# Altium PCB PCB1.PcbDoc (part 1 of 2)
Units mm, origin at the board's own origin, x right, y up, seen from the top; angles counter-clockwise.
Board outline 152.4 x 101.6 mm, 2 copper layers (Top Layer, Bottom Layer); 142 components, 437 nets, 1185 pads, 0 vias.
Unrouted connection lines stored in the file: 722.
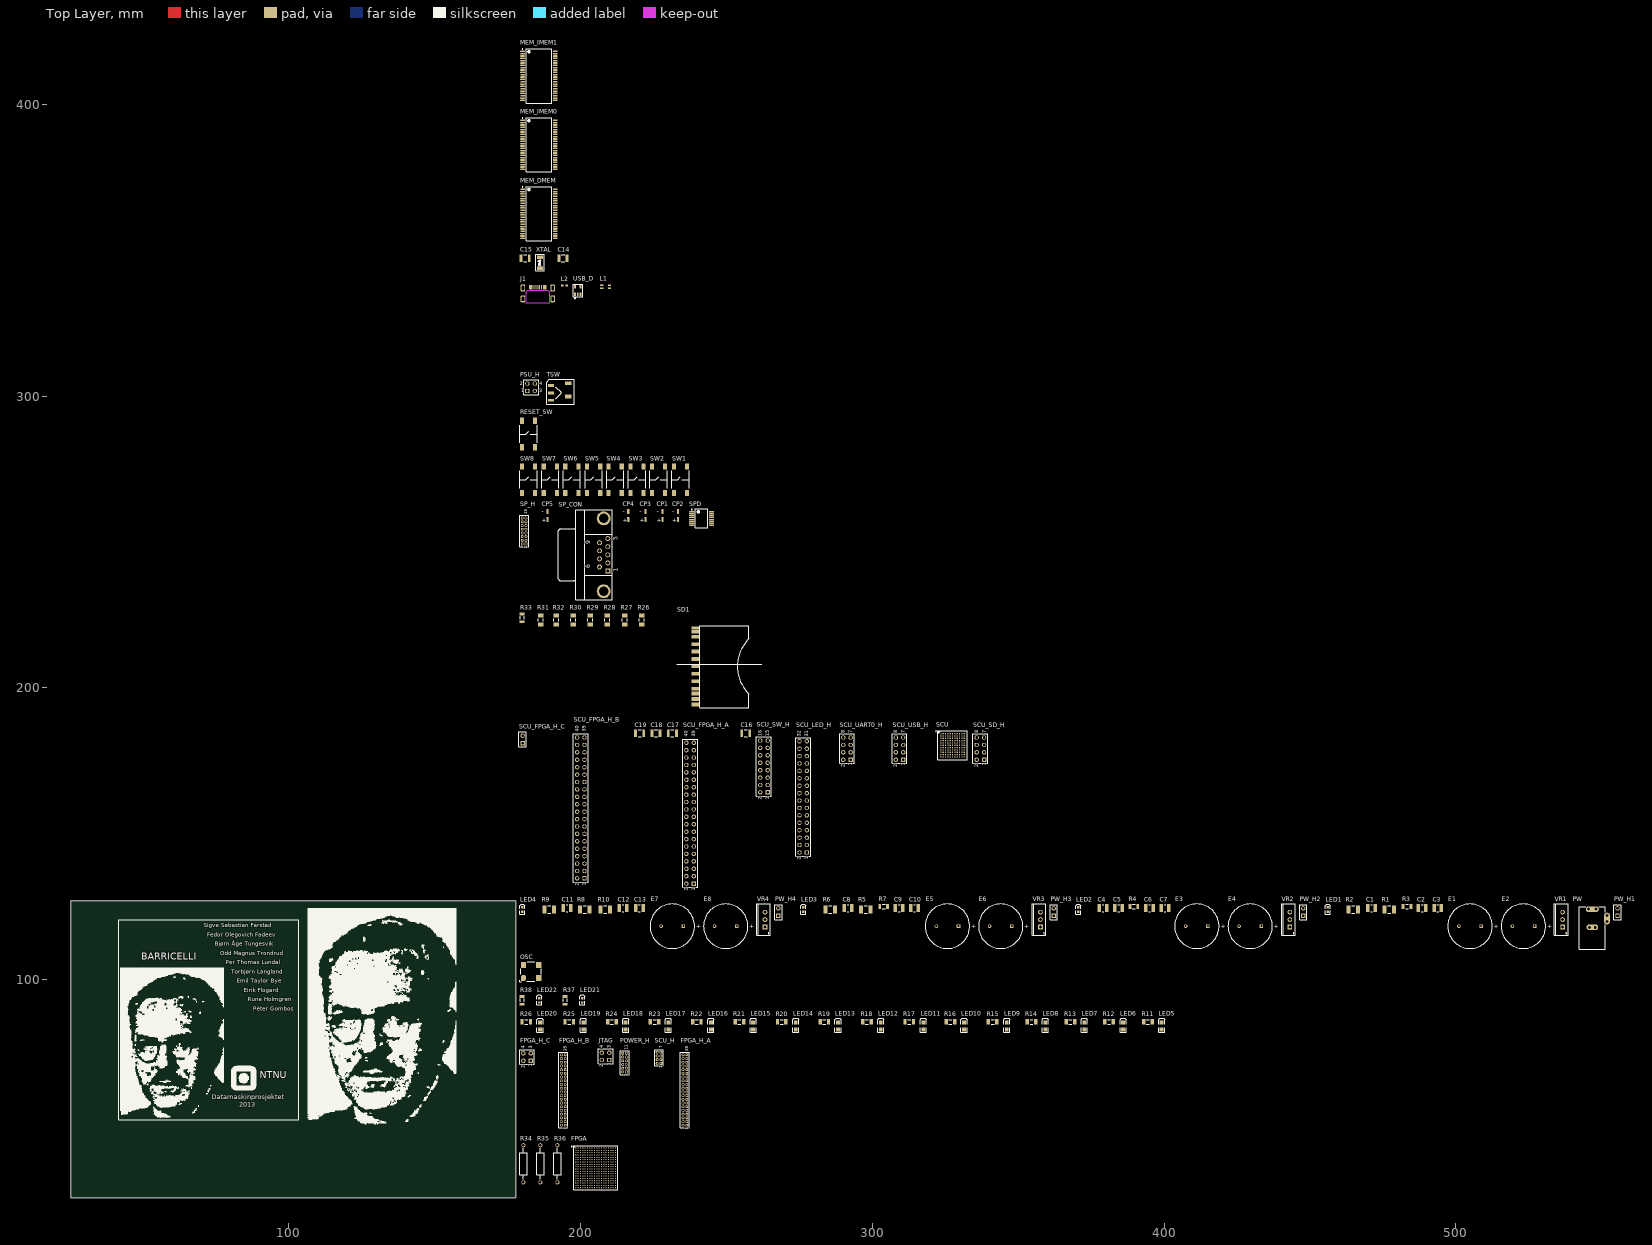
[diagram p0: Top Layer view]
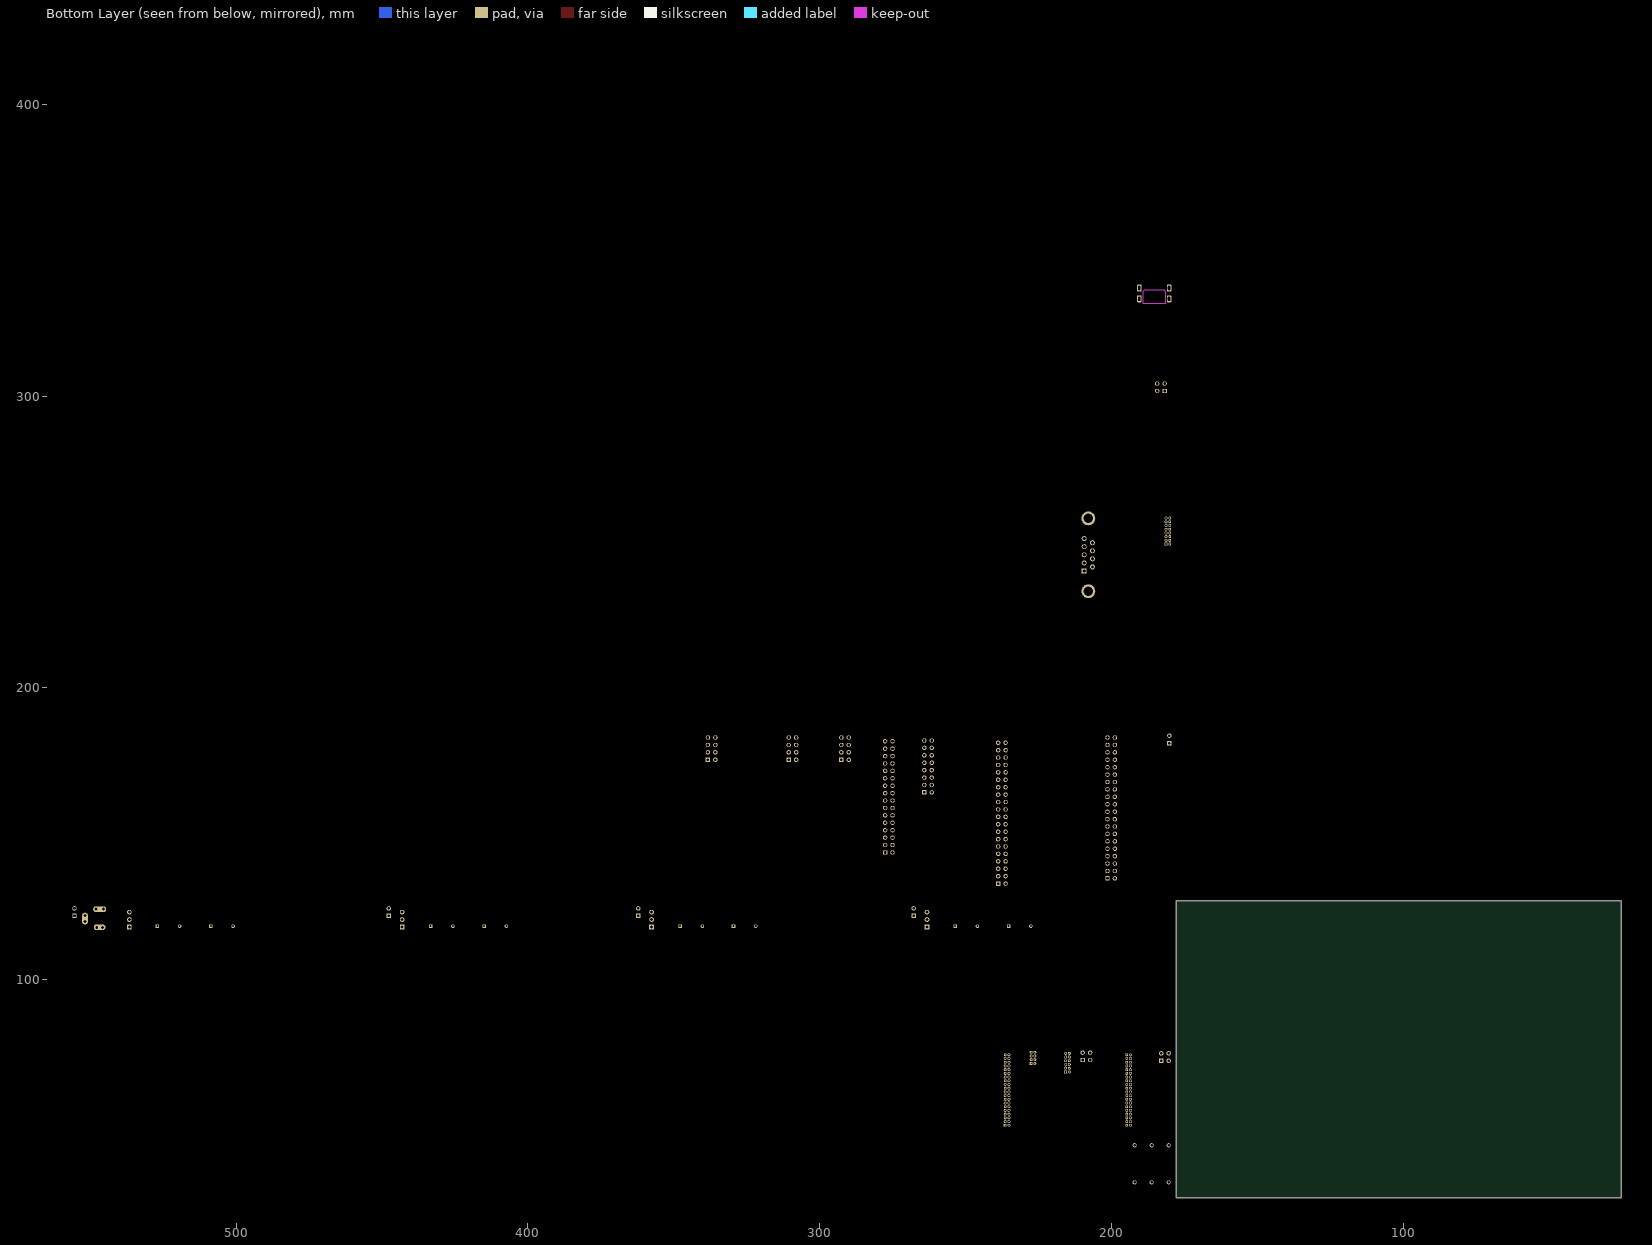
[diagram p1: Bottom Layer view, seen from below]

## Layer stack, top to bottom
Top Layer: signal copper 0.0356
Dielectric: dielectric 0.32, FR-4, Dk 4.8
Bottom Layer: signal copper 0.0356

## Board outline
25.4,25.4 177.8,25.4 177.8,127 25.4,127

## Design rules (kind name [scope] priority, off if disabled: settings)
Clearance [All] p1: gap=0.254
PolygonConnect [All] p1: connectstyle=Relief reliefconductorwidth=0.254 reliefentries=4 polygonreliefangle="90 Angle" airgapwidth=0.254
RoomDefinition XTAL [InComponentClass('XTAL')] p1: confinementstyle=ConfineIn formatcopy=TRUE lockcomponents=FALSE outline 178.943,342.646 196.596,342.646 196.596,351.409 178.943,351.409
RoomDefinition USB [InComponentClass('USB')] p2: confinementstyle=ConfineIn formatcopy=TRUE lockcomponents=FALSE outline 178.943,310.007 211.201,310.007 211.201,341.376 178.943,341.376
RoomDefinition U_psu_toggle_switch [InComponentClass('U_psu_toggle_switch')] p3: confinementstyle=ConfineIn formatcopy=TRUE lockcomponents=FALSE outline 178.943,296.926 198.247,296.926 198.247,308.61 178.943,308.61
RoomDefinition U_microcontroller_reset_button [InComponentClass('U_microcontroller_reset_button')] p4: confinementstyle=ConfineIn formatcopy=TRUE lockcomponents=FALSE outline 178.943,281.051 191.516,281.051 191.516,295.656 178.943,295.656
RoomDefinition SW [InComponentClass('SW')] p5: confinementstyle=ConfineIn formatcopy=TRUE lockcomponents=FALSE outline 178.943,265.43 237.49,265.43 237.49,279.781 178.943,279.781
RoomDefinition SERIAL_PORT [InComponentClass('SERIAL_PORT')] p6: confinementstyle=ConfineIn formatcopy=TRUE lockcomponents=FALSE outline 178.943,229.87 246.126,229.87 246.126,264.16 178.943,264.16
RoomDefinition SD [InComponentClass('SD')] p7: confinementstyle=ConfineIn formatcopy=TRUE lockcomponents=FALSE outline 178.943,84.201 254.889,84.201 254.889,228.727 178.943,228.727
RoomDefinition SCU [InComponentClass('SCU')] p8: confinementstyle=ConfineIn formatcopy=TRUE lockcomponents=FALSE outline 178.943,130.048 346.837,130.048 346.837,188.595 178.943,188.595
RoomDefinition PS [InComponentClass('PS')] p9: confinementstyle=ConfineIn formatcopy=TRUE lockcomponents=FALSE outline 178.943,110.236 561.34,110.236 561.34,128.778 178.943,128.778
RoomDefinition OSC [InComponentClass('OSC')] p10: confinementstyle=ConfineIn formatcopy=TRUE lockcomponents=FALSE outline 178.943,98.933 186.944,98.933 186.944,108.966 178.943,108.966
RoomDefinition LEDS_LOGO [InComponentClass('LEDS_LOGO')] p11: confinementstyle=ConfineIn formatcopy=TRUE lockcomponents=FALSE outline 178.943,90.805 207.01,90.805 207.01,97.663 178.943,97.663
RoomDefinition LEDS [InComponentClass('LEDS')] p12: confinementstyle=ConfineIn formatcopy=TRUE lockcomponents=FALSE outline 178.943,81.661 404.241,81.661 404.241,228.727 178.943,228.727
RoomDefinition IMEM1 [InComponentClass('IMEM1')] p13: confinementstyle=ConfineIn formatcopy=TRUE lockcomponents=FALSE outline 178.943,399.923 192.659,399.923 192.659,422.275 178.943,422.275
RoomDefinition IMEM0 [InComponentClass('IMEM0')] p14: confinementstyle=ConfineIn formatcopy=TRUE lockcomponents=FALSE outline 178.943,376.301 192.786,376.301 192.786,398.653 178.943,398.653
RoomDefinition HEADERS [InComponentClass('HEADERS')] p15: confinementstyle=ConfineIn formatcopy=TRUE lockcomponents=FALSE outline 178.943,48.133 246.634,48.133 246.634,80.391 178.943,80.391
RoomDefinition FPGA [InComponentClass('FPGA')] p16: confinementstyle=ConfineIn formatcopy=TRUE lockcomponents=FALSE outline 178.943,26.797 213.995,26.797 213.995,46.863 178.943,46.863
RoomDefinition DMEM [InComponentClass('DMEM')] p17: confinementstyle=ConfineIn formatcopy=TRUE lockcomponents=FALSE outline 178.943,352.679 192.659,352.679 192.659,375.031 178.943,375.031
RoutingVias [All] p1: holewidth=0.711 width=1.27 viastyle="Through Hole" minholewidth=0.711 minwidth=1.27 maxholewidth=0.711 maxwidth=1.27
SolderMaskExpansion [All] p1: expansion=0.102
Width [All] p1: maxlimit=0.254 minlimit=0.254 preferedwidth=0.254
28 further rules are at their usual default settings.

## Classes and differential pairs
channel class memorychip_schematic: DMEM IMEM0 IMEM1
net class SW[0..7]: SW0 SW1 SW2 SW3 SW4 SW5 SW6 SW7
net class LED[0..15]: LED0 LED1 LED2 LED3 LED4 LED5 LED6 LED7 LED8 LED9 LED10 LED11 LED12 LED13 LED14 LED15
net class INST_MEM1.BUS[0..15]: INST_MEM1.BUS0 INST_MEM1.BUS1 INST_MEM1.BUS2 INST_MEM1.BUS3 INST_MEM1.BUS4 INST_MEM1.BUS5 INST_MEM1.BUS6 INST_MEM1.BUS7 INST_MEM1.BUS8 INST_MEM1.BUS9 INST_MEM1.BUS10 INST_MEM1.BUS11 INST_MEM1.BUS12 INST_MEM1.BUS13 INST_MEM1.BUS14 INST_MEM1.BUS15
net class INST_MEM0.BUS[0..15]: INST_MEM0.BUS0 INST_MEM0.BUS1 INST_MEM0.BUS2 INST_MEM0.BUS3 INST_MEM0.BUS4 INST_MEM0.BUS5 INST_MEM0.BUS6 INST_MEM0.BUS7 INST_MEM0.BUS8 INST_MEM0.BUS9 INST_MEM0.BUS10 INST_MEM0.BUS11 INST_MEM0.BUS12 INST_MEM0.BUS13 INST_MEM0.BUS14 INST_MEM0.BUS15
net class FPGA_INSTADDR[0..18]: FPGA_INSTADDR0 FPGA_INSTADDR1 FPGA_INSTADDR2 FPGA_INSTADDR3 FPGA_INSTADDR4 FPGA_INSTADDR5 FPGA_INSTADDR6 FPGA_INSTADDR7 FPGA_INSTADDR8 FPGA_INSTADDR9 FPGA_INSTADDR10 FPGA_INSTADDR11 FPGA_INSTADDR12 FPGA_INSTADDR13 FPGA_INSTADDR14 FPGA_INSTADDR15 FPGA_INSTADDR16 FPGA_INSTADDR17 FPGA_INSTADDR18
net class FPGA_HEADER[0..83]: FPGA_HEADER0 FPGA_HEADER1 FPGA_HEADER2 FPGA_HEADER3 FPGA_HEADER4 FPGA_HEADER5 FPGA_HEADER6 FPGA_HEADER7 FPGA_HEADER8 FPGA_HEADER9 FPGA_HEADER10 FPGA_HEADER11 FPGA_HEADER12 FPGA_HEADER13 FPGA_HEADER14 FPGA_HEADER15 FPGA_HEADER16 FPGA_HEADER17 FPGA_HEADER18 FPGA_HEADER19 FPGA_HEADER20 FPGA_HEADER21 FPGA_HEADER22 FPGA_HEADER23 FPGA_HEADER24 FPGA_HEADER25 FPGA_HEADER26 FPGA_HEADER27 FPGA_HEADER28 FPGA_HEADER29 FPGA_HEADER30 FPGA_HEADER31 FPGA_HEADER32 FPGA_HEADER33 FPGA_HEADER34 FPGA_HEADER35 FPGA_HEADER36 FPGA_HEADER37 FPGA_HEADER38 FPGA_HEADER39 FPGA_HEADER40 FPGA_HEADER41 FPGA_HEADER42 FPGA_HEADER43 FPGA_HEADER44 FPGA_HEADER45 FPGA_HEADER46 FPGA_HEADER47 FPGA_HEADER48 FPGA_HEADER49 FPGA_HEADER50 FPGA_HEADER51 FPGA_HEADER52 FPGA_HEADER53 FPGA_HEADER54 FPGA_HEADER55 FPGA_HEADER56 FPGA_HEADER57 FPGA_HEADER58 FPGA_HEADER59 FPGA_HEADER60 FPGA_HEADER61 FPGA_HEADER62 FPGA_HEADER63 FPGA_HEADER64 FPGA_HEADER65 FPGA_HEADER66 FPGA_HEADER67 FPGA_HEADER68 FPGA_HEADER69 FPGA_HEADER70 FPGA_HEADER71 FPGA_HEADER72 FPGA_HEADER73 FPGA_HEADER74 FPGA_HEADER75 FPGA_HEADER76 FPGA_HEADER77 FPGA_HEADER78 FPGA_HEADER79 FPGA_HEADER80 FPGA_HEADER81 FPGA_HEADER82 FPGA_HEADER83
net class FPGA.STATE[0..2]: FPGA.STATE0 FPGA.STATE1 FPGA.STATE2
net class FPGA.BUS[0..15]: FPGA.BUS0 FPGA.BUS1 FPGA.BUS2 FPGA.BUS3 FPGA.BUS4 FPGA.BUS5 FPGA.BUS6 FPGA.BUS7 FPGA.BUS8 FPGA.BUS9 FPGA.BUS10 FPGA.BUS11 FPGA.BUS12 FPGA.BUS13 FPGA.BUS14 FPGA.BUS15
net class FPGA.ADDR[0..19]: FPGA.ADDR0 FPGA.ADDR1 FPGA.ADDR2 FPGA.ADDR3 FPGA.ADDR4 FPGA.ADDR5 FPGA.ADDR6 FPGA.ADDR7 FPGA.ADDR8 FPGA.ADDR9 FPGA.ADDR10 FPGA.ADDR11 FPGA.ADDR12 FPGA.ADDR13 FPGA.ADDR14 FPGA.ADDR15 FPGA.ADDR16 FPGA.ADDR17 FPGA.ADDR18 FPGA.ADDR19
net class DATA_MEM.BUS[0..15]: DATA_MEM.BUS0 DATA_MEM.BUS1 DATA_MEM.BUS2 DATA_MEM.BUS3 DATA_MEM.BUS4 DATA_MEM.BUS5 DATA_MEM.BUS6 DATA_MEM.BUS7 DATA_MEM.BUS8 DATA_MEM.BUS9 DATA_MEM.BUS10 DATA_MEM.BUS11 DATA_MEM.BUS12 DATA_MEM.BUS13 DATA_MEM.BUS14 DATA_MEM.BUS15
net class DATA_MEM.ADDR[0..18]: DATA_MEM.ADDR0 DATA_MEM.ADDR1 DATA_MEM.ADDR2 DATA_MEM.ADDR3 DATA_MEM.ADDR4 DATA_MEM.ADDR5 DATA_MEM.ADDR6 DATA_MEM.ADDR7 DATA_MEM.ADDR8 DATA_MEM.ADDR9 DATA_MEM.ADDR10 DATA_MEM.ADDR11 DATA_MEM.ADDR12 DATA_MEM.ADDR13 DATA_MEM.ADDR14 DATA_MEM.ADDR15 DATA_MEM.ADDR16 DATA_MEM.ADDR17 DATA_MEM.ADDR18
component class XTAL: C14 C15 XTAL
component class USB: J1 L1 L2 USB_D
component class U_psu_toggle_switch: PSU_H TSW
component class U_microcontroller_reset_button: RESET_SW
component class SW: SW1 SW2 SW3 SW4 SW5 SW6 SW7 SW8
component class SERIAL_PORT: CP1 CP2 CP3 CP4 CP5 SP_CON SP_H SPD
component class SD: R26 R27 R28 R29 R30 R31 R32 R33 SD1
component class SCU: C16 C17 C18 C19 SCU SCU_FPGA_H_A SCU_FPGA_H_B SCU_FPGA_H_C SCU_LED_H SCU_SD_H SCU_SW_H SCU_UART0_H SCU_USB_H
component class PS: C1 C2 C3 C4 C5 C6 C7 C8 C9 C10 C11 C12 C13 E1 E2 E3 E4 E5 E6 E7 E8 LED1 LED2 LED3 LED4 PW PW_H1 PW_H2 PW_H3 PW_H4 R1 R2 R3 R4 R5 R6 R7 R8 R9 R10 VR1 VR2 VR3 VR4
component class OSC: OSC
component class LEDS: LED5 LED6 LED7 LED8 LED9 LED10 LED11 LED12 LED13 LED14 LED15 LED16 LED17 LED18 LED19 LED20 R11 R12 R13 R14 R15 R16 R17 R18 R19 R20 R21 R22 R23 R24 R25 R26
component class LEDS_LOGO: LED21 LED22 R37 R38
component class IMEM1: MEM_IMEM1
component class IMEM0: MEM_IMEM0
component class HEADERS: FPGA_H_A FPGA_H_B FPGA_H_C JTAG POWER_H SCU_H
component class FPGA: FPGA R34 R35 R36
component class DMEM: MEM_DMEM

## Components (designator, comment, footprint, x,y, rotation, side; value= is the part's Value field where it differs from the comment)
C1 "Cap Semi" CAPC1210(3225)105_L 471.043,124.587 r0 top
C2 "Cap Semi" CAPC1210(3225)105_L 488.442,124.587 r0 top
C3 "Cap Semi" CAPC1210(3225)105_L 493.776,124.587 r0 top
C4 "Cap Semi" CAPC1210(3225)105_L 379.095,124.587 r0 top
C5 "Cap Semi" CAPC1210(3225)105_L 384.429,124.587 r0 top
C6 "Cap Semi" CAPC1210(3225)105_L 394.97,124.587 r0 top
C7 "Cap Semi" CAPC1210(3225)105_L 400.304,124.587 r0 top
C8 "Cap Semi" CAPC1210(3225)105_L 291.719,124.587 r0 top
C9 "Cap Semi" CAPC1210(3225)105_L 309.245,124.587 r0 top
C10 "Cap Semi" CAPC1210(3225)105_L 314.452,124.587 r0 top
C11 "Cap Semi" CAPC1210(3225)105_L 195.453,124.587 r0 top
C12 "Cap Semi" CAPC1210(3225)105_L 214.63,124.587 r0 top
C13 "Cap Semi" CAPC1210(3225)105_L 220.218,124.587 r0 top
C14 "Cap 1210 SMD" CAPC1210(3225)100_L 194.056,347.218 r0 top
C15 "Cap 1210 SMD" CAPC1210(3225)100_L 181.102,347.218 r0 top
C16 "CAP 10pF 100V 1210(3225)" CAPC1210(3225)100_L 256.667,184.404 r0 top
C17 "CAP 10pF 100V 1210(3225)" CAPC1210(3225)100_L 231.521,184.404 r0 top
C18 "CAP 10pF 100V 1210(3225)" CAPC1210(3225)100_L 225.933,184.404 r0 top
C19 "CAP 10pF 100V 1210(3225)" CAPC1210(3225)100_L 220.345,184.404 r0 top
CP1 "100nF" cap_pol_size_B 228.092,259.08 r0 top
CP2 "100nF" cap_pol_size_B 233.426,259.08 r0 top
CP3 "100nF" cap_pol_size_B 222.25,259.08 r0 top
CP4 "100nF" cap_pol_size_B 216.408,259.08 r0 top
CP5 "100nF" cap_pol_size_B 188.722,259.08 r0 top
E1 "Cap Pol1" RB7.6-15 504.825,118.364 r0 top
E2 "Cap Pol1" RB7.6-15 523.113,118.364 r0 top
E3 "Cap Pol1" RB7.6-15 411.226,118.364 r0 top
E4 "Cap Pol1" RB7.6-15 429.514,118.364 r0 top
E5 "Cap Pol1" RB7.6-15 325.755,118.364 r0 top
E6 "Cap Pol1" RB7.6-15 344.043,118.364 r0 top
E7 "Cap Pol1" RB7.6-15 231.521,118.364 r0 top
E8 "Cap Pol1" RB7.6-15 249.809,118.364 r0 top
FPGA "XC6SLX45-2CSG324I" CSG324 205.232,35.56 r0 top
FPGA_H_A "MHDR2X20" MHDR2X20 236.474,50.165 r90 top
FPGA_H_B "MHDR2X20" MHDR2X20 194.818,50.165 r90 top
FPGA_H_C "Header 2X2" HDR2X2 183.007,72.263 r90 top
J1 "USB Micro Type B" USB_Micro-B_FCI_SMD 185.42,331.724 r0 top
JTAG "Header 2X2" HDR2X2 209.931,72.517 r90 top
L1 "160 Ohm" "WE-CNSW, 1206" 208.661,337.439 r0 top
L2 "300 Ohm" "SMD 0603" 194.564,337.82 r0 top
LED1 "HSMC-C190" 1.6X0.8X0.8 456.057,124.079 r90 top
LED2 "HSMC-C190" 1.6X0.8X0.8 370.586,124.079 r90 top
LED3 "HSMC-C190" 1.6X0.8X0.8 276.352,124.079 r90 top
LED4 "HSMC-C190" 1.6X0.8X0.8 180.086,124.079 r90 top
LED5 "HSMG-C170" 2.0X1.25X0.8 399.161,84.201 r90 top
LED6 "HSMG-C170" 2.0X1.25X0.8 385.953,84.201 r90 top
LED7 "HSMG-C170" 2.0X1.25X0.8 372.618,84.201 r90 top
LED8 "HSMG-C170" 2.0X1.25X0.8 359.283,84.201 r90 top
LED9 "HSMG-C170" 2.0X1.25X0.8 346.075,84.201 r90 top
LED10 "HSMG-C170" 2.0X1.25X0.8 331.47,84.201 r90 top
LED11 "HSMG-C170" 2.0X1.25X0.8 317.5,84.201 r90 top
LED12 "HSMG-C170" 2.0X1.25X0.8 302.895,84.201 r90 top
LED13 "HSMG-C170" 2.0X1.25X0.8 288.29,84.201 r90 top
LED14 "HSMG-C170" 2.0X1.25X0.8 273.812,84.201 r90 top
LED15 "HSMG-C170" 2.0X1.25X0.8 259.207,84.201 r90 top
LED16 "HSMG-C170" 2.0X1.25X0.8 244.729,84.201 r90 top
LED17 "HSMG-C170" 2.0X1.25X0.8 230.124,84.201 r90 top
LED18 "HSMG-C170" 2.0X1.25X0.8 215.519,84.201 r90 top
LED19 "HSMG-C170" 2.0X1.25X0.8 201.041,84.201 r90 top
LED20 "HSMG-C170" 2.0X1.25X0.8 186.182,84.201 r90 top
LED21 "HSMC-C190" 1.6X0.8X0.8 200.66,92.964 r90 top
LED22 "HSMC-C190" 1.6X0.8X0.8 185.928,92.964 r90 top
MEM_DMEM "memchip-AS7C38098A" AS7C38098A-10TIN 185.801,362.458 r0 top (schematic designator MEM)
MEM_IMEM0 "memchip-AS7C38098A" AS7C38098A-10TIN 185.801,386.08 r0 top (schematic designator MEM)
MEM_IMEM1 "memchip-AS7C38098A" AS7C38098A-10TIN 185.801,409.702 r0 top (schematic designator MEM)
OSC "Oscillator TXC 7W" "TXC - 7W-60.000MBB-T" 183.134,102.87 r0 top
POWER_H "MHDR2X6" MHDR2X6 215.773,68.453 r90 top
PSU_H "Header 2X2" HDR2X2 181.864,301.752 r0 top
PW "DC-10B" KLD-0202 546.735,110.49 r90 top
PW_H1 "Header 2" HDR1X2 555.371,121.92 r90 top
PW_H2 "Header 2" HDR1X2 447.675,121.92 r90 top
PW_H3 "Header 2" HDR1X2 362.204,121.92 r90 top
PW_H4 "Header 2" HDR1X2 267.843,121.92 r90 top
R1 "Res 1210" RESC1210(3225)_M 477.139,124.079 r0 top
R2 "Res 1210" RESC1210(3225)_M 464.82,124.079 r0 top
R3 "Res 1206" RESC1206(3216)_L 483.235,125.095 r0 top
R4 "Res 1206" RESC1206(3216)_L 389.636,125.095 r0 top
R5 "Res 1210" RESC1210(3225)_M 297.815,124.079 r0 top
R6 "Res 1210" RESC1210(3225)_M 285.623,124.079 r0 top
R7 "Res 1206" RESC1206(3216)_L 303.911,125.095 r0 top
R8 "Res 1210" RESC1210(3225)_M 201.549,124.079 r0 top
R9 "Res 1210" RESC1210(3225)_M 189.357,124.079 r0 top
R10 "Res 1210" RESC1210(3225)_M 208.534,124.079 r0 top
R11 "56R 5% 1206(3216)" RESC1206(3216)_N 394.462,85.598 r0 top
R12 "56R 5% 1206(3216)" RESC1206(3216)_N 381.127,85.598 r0 top
R13 "56R 5% 1206(3216)" RESC1206(3216)_N 367.919,85.598 r0 top
R14 "56R 5% 1206(3216)" RESC1206(3216)_N 354.584,85.598 r0 top
R15 "56R 5% 1206(3216)" RESC1206(3216)_N 341.249,85.598 r0 top
R16 "56R 5% 1206(3216)" RESC1206(3216)_N 326.771,85.598 r0 top
R17 "56R 5% 1206(3216)" RESC1206(3216)_N 312.674,85.598 r0 top
R18 "56R 5% 1206(3216)" RESC1206(3216)_N 298.196,85.598 r0 top
R19 "56R 5% 1206(3216)" RESC1206(3216)_N 283.591,85.598 r0 top
R20 "56R 5% 1206(3216)" RESC1206(3216)_N 268.986,85.598 r0 top
R21 "56R 5% 1206(3216)" RESC1206(3216)_N 254.508,85.598 r0 top
R22 "56R 5% 1206(3216)" RESC1206(3216)_N 239.903,85.598 r0 top
R23 "56R 5% 1206(3216)" RESC1206(3216)_N 225.425,85.598 r0 top
R24 "56R 5% 1206(3216)" RESC1206(3216)_N 210.82,85.598 r0 top
R25 "56R 5% 1206(3216)" RESC1206(3216)_N 196.215,85.598 r0 top
R26 "56R 5% 1206(3216)" RESC1206(3216)_N 181.483,85.598 r0 top
R26 "Res 1206 for SD" RESC1206(3216)_M 220.98,223.266 r90 top
R27 "Res 1206 for SD" RESC1206(3216)_M 215.138,223.266 r90 top
R28 "Res 1206 for SD" RESC1206(3216)_M 209.296,223.266 r90 top
R29 "Res 1206 for SD" RESC1206(3216)_M 203.454,223.266 r90 top
R30 "Res 1206 for SD" RESC1206(3216)_M 197.612,223.266 r90 top
R31 "Res 1206 for SD" RESC1206(3216)_M 186.436,223.266 r90 top
R32 "Res 1206 for SD" RESC1206(3216)_M 191.77,223.266 r90 top
R33 "Res 1206 for SD" RESC1206(3216)_L 180.086,224.028 r90 top
R34 "Res Semi" AXIAL-0.5 180.467,36.957 r90 top
R35 "Res Semi" AXIAL-0.5 186.309,36.957 r90 top
R36 "Res Semi" AXIAL-0.5 192.151,36.957 r90 top
R37 "Res 1206 for logo" RESC1206(3216)_L 194.818,92.964 r90 top
R38 "Res 1206 for logo" RESC1206(3216)_L 180.086,92.964 r90 top
RESET_SW "FSM2JSMA" Button 179.959,282.448 r0 top
SCU "EFM32GG390F1024-BGA112" ENMR-BGA112 327.533,180.34 r0 top
SCU_FPGA_H_A "Header 20X2" HDR2X20 238.887,132.969 r90 top
SCU_FPGA_H_B "Header 20X2" HDR2X20 201.422,134.747 r90 top
SCU_FPGA_H_C "Header 2" HDR1X2 180.213,181.102 r90 top
SCU_H "MHDR2X4" MHDR2X4 227.584,71.374 r90 top
SCU_LED_H "Header 16X2" HDR2X16 277.622,143.637 r90 top
SCU_SD_H "Header 4X2" HDR2X4 338.328,175.387 r90 top
SCU_SW_H "Header 8X2" HDR2X8 264.16,164.211 r90 top
SCU_UART0_H "Header 4X2" HDR2X4 292.608,175.387 r90 top
SCU_USB_H "Header 4X2" HDR2X4 310.642,175.387 r90 top
SD1 "sd" "Edge Connector - duplicate1" 240.665,193.929 r90 top
SP_CON "D Connector 9" DSUB1.385-2H9 198.501,245.618 r90 top
SP_H "MHDR2X8" MHDR2X8 181.356,249.301 r90 top
SPD "MAX3232CDBE4" TI-DB16_L 241.554,258.064 r0 top
SW1 "FSM2JSMA" Button 232.029,266.827 r0 top
SW2 "FSM2JSMA" Button 224.536,266.827 r0 top
SW3 "FSM2JSMA" Button 217.17,266.827 r0 top
SW4 "FSM2JSMA" Button 209.677,266.827 r0 top
SW5 "FSM2JSMA" Button 202.311,266.827 r0 top
SW6 "FSM2JSMA" Button 194.818,266.827 r0 top
SW7 "FSM2JSMA" Button 187.452,266.827 r0 top
SW8 "FSM2JSMA" Button 179.959,266.827 r0 top
TSW "G3T13AP" G3T13AP 192.913,301.752 r0 top
USB_D "#NAME?" SOT23_5L 199.136,336.169 r90 top
VR1 "LM1084IT-ADJ" T03B 536.575,120.65 r90 top
VR2 "LM1084IT-3.3" T03B 443.103,120.65 r90 top
VR3 "LM1084IT-ADJ" T03B 357.632,120.65 r90 top
VR4 "LM1084IT-ADJ" T03B 263.271,120.65 r90 top
XTAL "Crystal ABS10-32.768kHz" crystal-ABS10-32.768KHZ-T 186.182,345.694 r90 top

## Footprints (in the part's own frame and the unit in brackets; to place one, negate y for a bottom-side part, rotate by r counter-clockwise, add the part's x,y. Pads: shape width x height; smd on the part's side, far side on the other; paste and mask are expansions set on the pad)
1.6X0.8X0.8 [mm] "SM LED; 2 Flat Leads"
  rect 0.8x0.8 smd: 1(-0.75,0) 2(0.75,0)
  silkscreen extent -1.55,-0.8 1.85,0.8
2.0X1.25X0.8 [mm] "SM LED; 2 Flat Leads"
  rect 1.3x1.3 smd: 1(-1.2,0) 2(1.2,0)
  silkscreen extent -2.25,-1.05 2.55,1.05
AS7C38098A-10TIN [mm] "TSOPII, 44-Leads, Body 18,41x10,16mm, Pitch 0,80mm, IPC Medium Density"
  oval 1.6x0.55 smd: 1(-5.6,8.4) 2(-5.6,7.6) 3(-5.6,6.8) 4(-5.6,6) 5(-5.6,5.2) 6(-5.6,4.4) 7(-5.6,3.6) 8(-5.6,2.8) 9(-5.6,2) 10(-5.6,1.2) 11(-5.6,0.4) 12(-5.6,-0.4) 13(-5.6,-1.2) 14(-5.6,-2) 15(-5.6,-2.8) 16(-5.6,-3.6) 17(-5.6,-4.4) 18(-5.6,-5.2) 19(-5.6,-6) 20(-5.6,-6.8) 21(-5.6,-7.6) 22(-5.6,-8.4) 23(5.6,-8.4) 24(5.6,-7.6) 25(5.6,-6.8) 26(5.6,-6) 27(5.6,-5.2) 28(5.6,-4.4) 29(5.6,-3.6) 30(5.6,-2.8) 31(5.6,-2) 32(5.6,-1.2) 33(5.6,-0.4) 34(5.6,0.4) 35(5.6,1.2) 36(5.6,2) 37(5.6,2.8) 38(5.6,3.6) 39(5.6,4.4) 40(5.6,5.2) 41(5.6,6) 42(5.6,6.8) 43(5.6,7.6) 44(5.6,8.4)
  silkscreen extent -5.72,-9.3 4.4,9.35, body extent -5.2,-9.3 5.2,9.3, height 1.2
AXIAL-0.5 [mm] "Axial Device, Thru-Hole; 2 Leads; 0.5 in Pin Spacing"
  round 1.4 hole 0.85: 1(-6.35,0) 2(6.35,0)
  silkscreen extent -5.33,-1.27 5.33,1.27
Button [mm] "copied from 256 SoG"
  rect 1.4x2.1 smd: 1(0,9.1) 2(0,0) 3(4.5,9.1) 4(4.5,0)
  silkscreen extent -0.7,1.55 5.21,7.62
cap_pol_size_B [mm] "panasonic seris s type v size B ex. EEE1CA100AR"
  rect 0.7x1.8 smd: 1(0,-1.4) 2(0,1.4)
CAPC1210(3225)100_L [mm] "Chip Capacitor, Body 3.2x2.5mm, Height 1mm, IPC High Density"
  rect 0.95x2.6 smd: 1(-1.4,0) 2(1.4,0)
  silkscreen extent -0.55,-1.2 0.55,1.2, body extent -1.7,-1.35 1.7,1.35, height 1
CAPC1210(3225)105_L [mm] "Chip Capacitor, Body 3.2x2.5mm, Height 1.05mm, IPC High Density"
  rect 1.2x2.6 smd: 1(-1.275,0) 2(1.275,0)
  silkscreen extent -0.3,-1.2 0.3,1.2, body extent -1.7,-1.35 1.7,1.35, height 1.05
crystal-ABS10-32.768KHZ-T [mm]
  rect 1.3x2.2 smd: 1(-1.9,0) 2(1.9,0)
  silkscreen extent -2.8,-1.4 2.9,1.4
CSG324 [mm] "BGA, 324-Leads, Body 15x15mm, Pitch 0.8mm"
  round 0.36 smd: A1(-6.8,6.8) A2(-6,6.8) A3(-5.2,6.8) A4(-4.4,6.8) A5(-3.6,6.8) A6(-2.8,6.8) A7(-2,6.8) A8(-1.2,6.8) A9(-0.4,6.8) A10(0.4,6.8) A11(1.2,6.8) A12(2,6.8) A13(2.8,6.8) A14(3.6,6.8) A15(4.4,6.8) A16(5.2,6.8) A17(6,6.8) A18(6.8,6.8) B1(-6.8,6) B2(-6,6) B3(-5.2,6) B4(-4.4,6) B5(-3.6,6) B6(-2.8,6) B7(-2,6) B8(-1.2,6) B9(-0.4,6) B10(0.4,6) B11(1.2,6) B12(2,6) B13(2.8,6) B14(3.6,6) B15(4.4,6) B16(5.2,6) B17(6,6) B18(6.8,6) C1(-6.8,5.2) C2(-6,5.2) C3(-5.2,5.2) C4(-4.4,5.2) C5(-3.6,5.2) C6(-2.8,5.2) C7(-2,5.2) C8(-1.2,5.2) C9(-0.4,5.2) C10(0.4,5.2) C11(1.2,5.2) C12(2,5.2) C13(2.8,5.2) C14(3.6,5.2) C15(4.4,5.2) C16(5.2,5.2) C17(6,5.2) C18(6.8,5.2) D1(-6.8,4.4) D2(-6,4.4) D3(-5.2,4.4) D4(-4.4,4.4) D5(-3.6,4.4) D6(-2.8,4.4) D7(-2,4.4) D8(-1.2,4.4) D9(-0.4,4.4) D10(0.4,4.4) D11(1.2,4.4) D12(2,4.4) D13(2.8,4.4) D14(3.6,4.4) D15(4.4,4.4) D16(5.2,4.4) D17(6,4.4) D18(6.8,4.4) E1(-6.8,3.6) E2(-6,3.6) E3(-5.2,3.6) E4(-4.4,3.6) E5(-3.6,3.6) E6(-2.8,3.6) E7(-2,3.6) E8(-1.2,3.6) E9(-0.4,3.6) E10(0.4,3.6) E11(1.2,3.6) E12(2,3.6) E13(2.8,3.6) E14(3.6,3.6) E15(4.4,3.6) E16(5.2,3.6) E17(6,3.6) E18(6.8,3.6) F1(-6.8,2.8) F2(-6,2.8) F3(-5.2,2.8) F4(-4.4,2.8) F5(-3.6,2.8) F6(-2.8,2.8) F7(-2,2.8) F8(-1.2,2.8) F9(-0.4,2.8) F10(0.4,2.8) F11(1.2,2.8) F12(2,2.8) F13(2.8,2.8) F14(3.6,2.8) F15(4.4,2.8) F16(5.2,2.8) F17(6,2.8) F18(6.8,2.8) G1(-6.8,2) G2(-6,2) G3(-5.2,2) G4(-4.4,2) G5(-3.6,2) G6(-2.8,2) G7(-2,2) G8(-1.2,2) G9(-0.4,2) G10(0.4,2) G11(1.2,2) G12(2,2) G13(2.8,2) G14(3.6,2) G15(4.4,2) G16(5.2,2) G17(6,2) G18(6.8,2) H1(-6.8,1.2) H2(-6,1.2) H3(-5.2,1.2) H4(-4.4,1.2) H5(-3.6,1.2) H6(-2.8,1.2) H7(-2,1.2) H8(-1.2,1.2) H9(-0.4,1.2) H10(0.4,1.2) H11(1.2,1.2) H12(2,1.2) H13(2.8,1.2) H14(3.6,1.2) H15(4.4,1.2) H16(5.2,1.2) H17(6,1.2) H18(6.8,1.2) J1(-6.8,0.4) J2(-6,0.4) J3(-5.2,0.4) J4(-4.4,0.4) J5(-3.6,0.4) J6(-2.8,0.4) J7(-2,0.4) J8(-1.2,0.4) J9(-0.4,0.4) J10(0.4,0.4) J11(1.2,0.4) J12(2,0.4) J13(2.8,0.4) J14(3.6,0.4) J15(4.4,0.4) J16(5.2,0.4) J17(6,0.4) J18(6.8,0.4) K1(-6.8,-0.4) K2(-6,-0.4) K3(-5.2,-0.4) K4(-4.4,-0.4) K5(-3.6,-0.4) K6(-2.8,-0.4) K7(-2,-0.4) K8(-1.2,-0.4) K9(-0.4,-0.4) K10(0.4,-0.4) K11(1.2,-0.4) K12(2,-0.4) K13(2.8,-0.4) K14(3.6,-0.4) K15(4.4,-0.4) K16(5.2,-0.4) K17(6,-0.4) K18(6.8,-0.4) L1(-6.8,-1.2) L2(-6,-1.2) L3(-5.2,-1.2) L4(-4.4,-1.2) L5(-3.6,-1.2) L6(-2.8,-1.2) L7(-2,-1.2) L8(-1.2,-1.2) L9(-0.4,-1.2) L10(0.4,-1.2) L11(1.2,-1.2) L12(2,-1.2) L13(2.8,-1.2) L14(3.6,-1.2) L15(4.4,-1.2) L16(5.2,-1.2) L17(6,-1.2) L18(6.8,-1.2) M1(-6.8,-2) M2(-6,-2) M3(-5.2,-2) M4(-4.4,-2) M5(-3.6,-2) M6(-2.8,-2) M7(-2,-2) M8(-1.2,-2) M9(-0.4,-2) M10(0.4,-2) M11(1.2,-2) M12(2,-2) M13(2.8,-2) M14(3.6,-2) M15(4.4,-2) M16(5.2,-2) M17(6,-2) M18(6.8,-2) N1(-6.8,-2.8) N2(-6,-2.8) N3(-5.2,-2.8) N4(-4.4,-2.8) N5(-3.6,-2.8) N6(-2.8,-2.8) N7(-2,-2.8) N8(-1.2,-2.8) N9(-0.4,-2.8) N10(0.4,-2.8) N11(1.2,-2.8) N12(2,-2.8) N13(2.8,-2.8) N14(3.6,-2.8) N15(4.4,-2.8) N16(5.2,-2.8) N17(6,-2.8) N18(6.8,-2.8) P1(-6.8,-3.6) P2(-6,-3.6) P3(-5.2,-3.6) P4(-4.4,-3.6) P5(-3.6,-3.6) P6(-2.8,-3.6) P7(-2,-3.6) P8(-1.2,-3.6) P9(-0.4,-3.6) P10(0.4,-3.6) P11(1.2,-3.6) P12(2,-3.6) P13(2.8,-3.6) P14(3.6,-3.6) P15(4.4,-3.6) P16(5.2,-3.6) P17(6,-3.6) P18(6.8,-3.6) R1(-6.8,-4.4) R2(-6,-4.4) R3(-5.2,-4.4) R4(-4.4,-4.4) R5(-3.6,-4.4) R6(-2.8,-4.4) R7(-2,-4.4) R8(-1.2,-4.4) R9(-0.4,-4.4) R10(0.4,-4.4) R11(1.2,-4.4) R12(2,-4.4) R13(2.8,-4.4) R14(3.6,-4.4) R15(4.4,-4.4) R16(5.2,-4.4) R17(6,-4.4) R18(6.8,-4.4) T1(-6.8,-5.2) T2(-6,-5.2) T3(-5.2,-5.2) T4(-4.4,-5.2) T5(-3.6,-5.2) T6(-2.8,-5.2) T7(-2,-5.2) T8(-1.2,-5.2) T9(-0.4,-5.2) T10(0.4,-5.2) T11(1.2,-5.2) T12(2,-5.2) T13(2.8,-5.2) T14(3.6,-5.2) T15(4.4,-5.2) T16(5.2,-5.2) T17(6,-5.2) T18(6.8,-5.2) U1(-6.8,-6) U2(-6,-6) U3(-5.2,-6) U4(-4.4,-6) U5(-3.6,-6) U6(-2.8,-6) U7(-2,-6) U8(-1.2,-6) U9(-0.4,-6) U10(0.4,-6) U11(1.2,-6) U12(2,-6) U13(2.8,-6) U14(3.6,-6) U15(4.4,-6) U16(5.2,-6) U17(6,-6) U18(6.8,-6) V1(-6.8,-6.8) V2(-6,-6.8) V3(-5.2,-6.8) V4(-4.4,-6.8) V5(-3.6,-6.8) V6(-2.8,-6.8) V7(-2,-6.8) V8(-1.2,-6.8) V9(-0.4,-6.8) V10(0.4,-6.8) V11(1.2,-6.8) V12(2,-6.8) V13(2.8,-6.8) V14(3.6,-6.8) V15(4.4,-6.8) V16(5.2,-6.8) V17(6,-6.8) V18(6.8,-6.8)
  silkscreen extent -8.27,-7.5 7.5,7.5, body extent -7.5,-7.5 7.5,7.5, height 1.5
DSUB1.385-2H9 [mm] "Connector; D Subminiature; 9 Position; Right Angle; Pitch 1.385 mm"
  rect 1.69x1.69 hole 1.09: 1(-5.54,-10.92)
  round 1.69 hole 1.09: 2(-2.77,-10.92) 3(0,-10.92) 4(2.77,-10.92) 5(5.54,-10.92) 6(-4.155,-8.08) 7(-1.385,-8.08) 8(1.385,-8.08) 9(4.155,-8.08)
  round 4.76 hole 3.26: 10(-12.495,-9.5) 11(12.495,-9.5)
  silkscreen extent -15.4,-12.4 15.4,6
"Edge Connector - duplicate1" [mm]
  rect 1.26x2.5 smd: 1(21.082,1.27) 2(18.542,1.27) 3(16.002,1.27) 4(13.462,1.27) 5(10.922,1.27) 6(8.382,1.27) 7(5.842,1.27) 8(4.191,1.27) 9(23.622,1.27) 10(0.381,1.27) 11(2.286,1.27) 12(25.273,1.27)
  rect 1x2.5 smd: 13(26.67,1.27)
  silkscreen extent -0.64,-21.46 27.43,7.62
ENMR-BGA112 [mm] "BGA, 112-Balls, Body 10x10mm, Pitch 0.8mm"
  round 0.45 smd: A1(-4,4) A2(-3.2,4) A3(-2.4,4) A4(-1.6,4) A5(-0.8,4) A6(0,4) A7(0.8,4) A8(1.6,4) A9(2.4,4) A10(3.2,4) A11(4,4) B1(-4,3.2) B2(-3.2,3.2) B3(-2.4,3.2) B4(-1.6,3.2) B5(-0.8,3.2) B6(0,3.2) B7(0.8,3.2) B8(1.6,3.2) B9(2.4,3.2) B10(3.2,3.2) B11(4,3.2) C1(-4,2.4) C2(-3.2,2.4) C3(-2.4,2.4) C4(-1.6,2.4) C5(-0.8,2.4) C6(0,2.4) C7(0.8,2.4) C8(1.6,2.4) C9(2.4,2.4) C10(3.2,2.4) C11(4,2.4) D1(-4,1.6) D2(-3.2,1.6) D3(-2.4,1.6) D4(-1.6,1.6) D5(-0.8,1.6) D6(0,1.6) D7(0.8,1.6) D8(1.6,1.6) D9(2.4,1.6) D10(3.2,1.6) D11(4,1.6) E1(-4,0.8) E2(-3.2,0.8) E3(-2.4,0.8) E4(-1.6,0.8) E5(-0.8,0.8) E6(0,0.8) E7(0.8,0.8) E8(1.6,0.8) E9(2.4,0.8) E10(3.2,0.8) E11(4,0.8) F1(-4,0) F2(-3.2,0) F3(-2.4,0) F4(-1.6,0) F5(-0.8,0) F6(0,0) F7(0.8,0) F8(1.6,0) F9(2.4,0) F10(3.2,0) F11(4,0) G1(-4,-0.8) G2(-3.2,-0.8) G3(-2.4,-0.8) G4(-1.6,-0.8) G5(-0.8,-0.8) G6(0,-0.8) G7(0.8,-0.8) G8(1.6,-0.8) G9(2.4,-0.8) G10(3.2,-0.8) G11(4,-0.8) H1(-4,-1.6) H2(-3.2,-1.6) H3(-2.4,-1.6) H4(-1.6,-1.6) H5(-0.8,-1.6) H6(0,-1.6) H7(0.8,-1.6) H8(1.6,-1.6) H9(2.4,-1.6) H10(3.2,-1.6) H11(4,-1.6) J1(-4,-2.4) J2(-3.2,-2.4) J3(-2.4,-2.4) J4(-1.6,-2.4) J5(-0.8,-2.4) J6(0,-2.4) J7(0.8,-2.4) J8(1.6,-2.4) J9(2.4,-2.4) J10(3.2,-2.4) J11(4,-2.4) K1(-4,-3.2) K2(-3.2,-3.2) K3(-2.4,-3.2) K4(-1.6,-3.2) K5(-0.8,-3.2) K6(0,-3.2) K7(0.8,-3.2) K8(1.6,-3.2) K9(2.4,-3.2) K10(3.2,-3.2) K11(4,-3.2) L1(-4,-4) L2(-3.2,-4) L3(-2.4,-4) L4(-1.6,-4) L5(-0.8,-4) L6(0,-4) L7(0.8,-4) L8(1.6,-4) L9(2.4,-4) L10(3.2,-4) L11(4,-4)
  silkscreen extent -5.77,-5 5,5, body extent -5,-5 5,5, height 1.3
G3T13AP [mm]
  rect 2x1 smd: 4(-3,1.905) 5(-3,-0.635) 6(-3,-3.175)
  rect 2.2x1.2 smd: ""(3,-1.9) ""(3,2.605)
  silkscreen extent -4.5,-4.5 5,4
HDR1X2 [mm] "Connector; Header; 2 Position"
  rect 1.5x1.5 hole 0.9: 1(0,0)
  round 1.5 hole 0.9: 2(2.54,0)
  silkscreen extent -1.27,-1.27 3.81,1.27
HDR2X2 [mm] "Connector; Header; 2x2 Position"
  rect 1.5x1.5 hole 0.9: 1(0,0)
  round 1.5 hole 0.9: 2(0,2.54) 3(2.54,0) 4(2.54,2.54)
  silkscreen extent -1.27,-1.27 3.81,3.81
HDR2X4 [mm] "Connector; Header; 4x2 Position"
  rect 1.5x1.5 hole 0.9: 1(0,0)
  round 1.5 hole 0.9: 2(0,2.54) 3(2.54,0) 4(2.54,2.54) 5(5.08,0) 6(5.08,2.54) 7(7.62,0) 8(7.62,2.54)
  silkscreen extent -1.27,-1.27 8.89,3.81
HDR2X8 [mm] "Connector; Header; 8x2 Position"
  rect 1.5x1.5 hole 0.9: 1(0,0)
  round 1.5 hole 0.9: 2(0,2.54) 3(2.54,0) 4(2.54,2.54) 5(5.08,0) 6(5.08,2.54) 7(7.62,0) 8(7.62,2.54) 9(10.16,0) 10(10.16,2.54) 11(12.7,0) 12(12.7,2.54) 13(15.24,0) 14(15.24,2.54) 15(17.78,0) 16(17.78,2.54)
  silkscreen extent -1.27,-1.27 19.05,3.81
HDR2X16 [mm] "Connector; Header; 16x2 Position"
  rect 1.5x1.5 hole 0.9: 1(0,0)
  round 1.5 hole 0.9: 2(0,2.54) 3(2.54,0) 4(2.54,2.54) 5(5.08,0) 6(5.08,2.54) 7(7.62,0) 8(7.62,2.54) 9(10.16,0) 10(10.16,2.54) 11(12.7,0) 12(12.7,2.54) 13(15.24,0) 14(15.24,2.54) 15(17.78,0) 16(17.78,2.54) 17(20.32,0) 18(20.32,2.54) 19(22.86,0) 20(22.86,2.54) 21(25.4,0) 22(25.4,2.54) 23(27.94,0) 24(27.94,2.54) 25(30.48,0) 26(30.48,2.54) 27(33.02,0) 28(33.02,2.54) 29(35.56,0) 30(35.56,2.54) 31(38.1,0) 32(38.1,2.54)
  silkscreen extent -1.27,-1.27 39.37,3.81
HDR2X20 [mm] "Connector; Header; 20x2 Position"
  rect 1.5x1.5 hole 0.9: 1(0,0)
  round 1.5 hole 0.9: 2(0,2.54) 3(2.54,0) 4(2.54,2.54) 5(5.08,0) 6(5.08,2.54) 7(7.62,0) 8(7.62,2.54) 9(10.16,0) 10(10.16,2.54) 11(12.7,0) 12(12.7,2.54) 13(15.24,0) 14(15.24,2.54) 15(17.78,0) 16(17.78,2.54) 17(20.32,0) 18(20.32,2.54) 19(22.86,0) 20(22.86,2.54) 21(25.4,0) 22(25.4,2.54) 23(27.94,0) 24(27.94,2.54) 25(30.48,0) 26(30.48,2.54) 27(33.02,0) 28(33.02,2.54) 29(35.56,0) 30(35.56,2.54) 31(38.1,0) 32(38.1,2.54) 33(40.64,0) 34(40.64,2.54) 35(43.18,0) 36(43.18,2.54) 37(45.72,0) 38(45.72,2.54) 39(48.26,0) 40(48.26,2.54)
  silkscreen extent -1.27,-1.27 49.53,3.81
KLD-0202 [mm] "DC Power Jack, 2.5mm, KLD Series, PCB Mount"
  oval 2x4.5 all layers, no hole: 1(13.7,0)
  round 1.5 hole 1: 1A(13.7,-1.25) 1B(13.7,1.25) 2A(7.5,-1) 2B(7.5,1) 3A(9.5,-5) 3B(11.5,-5)
  oval 2x4 all layers, no hole: 2(7.5,0)
  oval 4x2 all layers, no hole: 3(10.5,-5)
  silkscreen extent 0,-4.5 14.6,4.5
MHDR2X4 [mm] "Connector; Header; 4x2 Position"
  rect 1x1 hole 0.6: 1(0,0)
  round 1 hole 0.6: 2(0,1.27) 3(1.27,0) 4(1.27,1.27) 5(2.54,0) 6(2.54,1.27) 7(3.81,0) 8(3.81,1.27)
  silkscreen extent -0.9,-0.9 4.71,2.17
MHDR2X6 [mm] "Connector; Header; 6x2 Position"
  rect 1x1 hole 0.6: 1(0,0)
  round 1 hole 0.6: 2(0,1.27) 3(1.27,0) 4(1.27,1.27) 5(2.54,0) 6(2.54,1.27) 7(3.81,0) 8(3.81,1.27) 9(5.08,0) 10(5.08,1.27) 11(6.35,0) 12(6.35,1.27)
  silkscreen extent -0.9,-0.9 7.25,2.17
MHDR2X8 [mm] "Connector; Header; 8x2 Position"
  rect 1x1 hole 0.6: 1(0,0)
  round 1 hole 0.6: 2(0,1.27) 3(1.27,0) 4(1.27,1.27) 5(2.54,0) 6(2.54,1.27) 7(3.81,0) 8(3.81,1.27) 9(5.08,0) 10(5.08,1.27) 11(6.35,0) 12(6.35,1.27) 13(7.62,0) 14(7.62,1.27) 15(8.89,0) 16(8.89,1.27)
  silkscreen extent -0.9,-0.9 9.79,2.17
MHDR2X20 [mm] "Connector; Header; 20x2 Position"
  rect 1x1 hole 0.6: 1(0,0)
  round 1 hole 0.6: 2(0,1.27) 3(1.27,0) 4(1.27,1.27) 5(2.54,0) 6(2.54,1.27) 7(3.81,0) 8(3.81,1.27) 9(5.08,0) 10(5.08,1.27) 11(6.35,0) 12(6.35,1.27) 13(7.62,0) 14(7.62,1.27) 15(8.89,0) 16(8.89,1.27) 17(10.16,0) 18(10.16,1.27) 19(11.43,0) 20(11.43,1.27) 21(12.7,0) 22(12.7,1.27) 23(13.97,0) 24(13.97,1.27) 25(15.24,0) 26(15.24,1.27) 27(16.51,0) 28(16.51,1.27) 29(17.78,0) 30(17.78,1.27) 31(19.05,0) 32(19.05,1.27) 33(20.32,0) 34(20.32,1.27) 35(21.59,0) 36(21.59,1.27) 37(22.86,0) 38(22.86,1.27) 39(24.13,0) 40(24.13,1.27)
  silkscreen extent -0.9,-0.9 25.03,2.17
RB7.6-15 [mm] "Polarized Capacitor (Radial); 2 Leads"
  rect 1.2x1.2 hole 0.7: 1(3.81,0)
  round 1.2 hole 0.7: 2(-3.81,0)
  silkscreen extent -7.62,-7.62 7.62,7.62
RESC1206(3216)_L [mm] "Chip Resistor, Body 3.2x1.6mm, IPC High Density"
  rect 0.95x1.7 smd: 1(-1.35,0) 2(1.35,0)
  silkscreen extent -0.5,-0.75 0.5,0.75, body extent -1.67,-0.87 1.67,0.87, height 0.75
RESC1206(3216)_M [mm] "Chip Resistor, Body 3.2x1.6mm, IPC Low Density"
  rect 1.35x1.9 smd: 1(-1.55,0) 2(1.55,0)
  silkscreen extent -0.5,-0.85 0.5,0.85, body extent -1.67,-0.87 1.67,0.87, height 0.75
RESC1206(3216)_N [mm] "Chip Resistor, Body 3.2x1.6mm, IPC Medium Density"
  rect 1.15x1.8 smd: 1(-1.45,0) 2(1.45,0)
  silkscreen extent -0.5,-0.8 0.5,0.8, body extent -1.67,-0.87 1.67,0.87, height 0.75
RESC1210(3225)_M [mm] "Chip Resistor, Body 3.2x2.5mm, IPC Low Density"
  rect 1.35x2.8 smd: 1(-1.6,0) 2(1.6,0)
  silkscreen extent -0.55,-1.3 0.55,1.3, body extent -1.7,-1.35 1.7,1.35, height 0.71
"SMD 0603" [mm] "Chip Inductor, 2-Leads, Body 1,6x0,8mm"
  rect 0.85x0.7 smd: 1(-0.775,0) 2(0.775,0)
  body extent -0.8,-0.4 0.8,0.4, height 0.79
SOT23_5L [mil] "SOT23_5L, 5-Leads, Body 3.60x2.9mm, Pitch 0.95mm"
  rect 44x24 smd: 1(-49.21,37.4) 2(-49.21,0) 3(-49.21,-37.4) 4(49.21,-37.4) 5(49.21,37.4)
  silkscreen extent -109,-65 86,65, body extent -55,-57 55,57, height 44
T03B [mm] "TO, Thru-Hole, Vertical, Heatsink Mounted; 3 In-Line Leads; Pitch 2.54 mm"
  rect 1.6x1.6 hole 1: 1(-2.54,0)
  round 1.6 hole 1: 2(0,0) 3(2.54,0)
  silkscreen extent -5.35,-1.85 5.35,2.85, body extent -5.4,-1.9 5.4,2.9, height 19.4
TI-DB16_L [mm] "SOP, 16-Leads, Body 6.2x5.3mm, Pitch 0.65mm, IPC High Density"
  oval 1.8x0.45 smd: 1(-3.4,2.275) 2(-3.4,1.625) 3(-3.4,0.975) 4(-3.4,0.325) 5(-3.4,-0.325) 6(-3.4,-0.975) 7(-3.4,-1.625) 8(-3.4,-2.275) 9(3.4,-2.275) 10(3.4,-1.625) 11(3.4,-0.975) 12(3.4,-0.325) 13(3.4,0.325) 14(3.4,0.975) 15(3.4,1.625) 16(3.4,2.275)
  silkscreen extent -3.52,-3.25 2.1,3.25, body extent -2.8,-3.25 2.8,3.25, height 2
"TXC - 7W-60.000MBB-T" [mm]
  rect 1x1 smd: 1(-3,-2.7)
  oct 1.8x2 smd: 1(-2.6,-2.2)
  rect 1.8x2 smd: 2(2.6,-2.2) 3(2.6,2.2) 4(-2.6,2.2)
  silkscreen extent -3.9,-3.6 3.5,3.3
USB_Micro-B_FCI_SMD [mm]
  round 0.508 on Mech14: 0(0,0)
  rrect20% 0.35x1.5 smd: 1(-1.3,5.6) 2(-0.65,5.6) 3(0,5.6) 4(0.65,5.6) 5(1.3,5.6)
  rrect50% 1.6x2.4 hole 0.8 slot 1.5 at 90 deg: SH(-5.1,1.6) SH(-5.1,5.3) SH(5.1,1.6) SH(5.1,5.3)
  rrect20% 1.2x1.5 smd: SH(-2.35,5.6) SH(2.35,5.6)
  Keep-Out Layer board cut-out: -3.9,0 -3.9,3.797 -3.839,4.103 -3.666,4.362 -3.406,4.536 -3.1,4.597 -3.1,4.597 3.1,4.597 3.406,4.536 3.666,4.362 3.839,4.103 3.9,3.797 3.9,3.797 3.9,0
  body extent -5.35,-21.58 5.35,5.8, height 4.67
"WE-CNSW, 1206" [mm] "SMD Inductor, 4-Leads, Body 1,8x3,4mm"
  rect 1.1x0.6 smd: 1(-1.35,0.5) 2(1.35,0.5) 3(1.35,-0.5) 4(-1.35,-0.5)
  body extent -1.6,-0.8 1.6,0.8, height 1.88